# Altium PCB SHT30PCB.PcbDoc
Units mil, origin at the board's own origin, x right, y up, seen from the top; angles counter-clockwise.
Board outline 590 x 630 mil, 2 copper layers (Top Layer, Bottom Layer); 8 components, 7 nets, 28 pads, 6 vias.
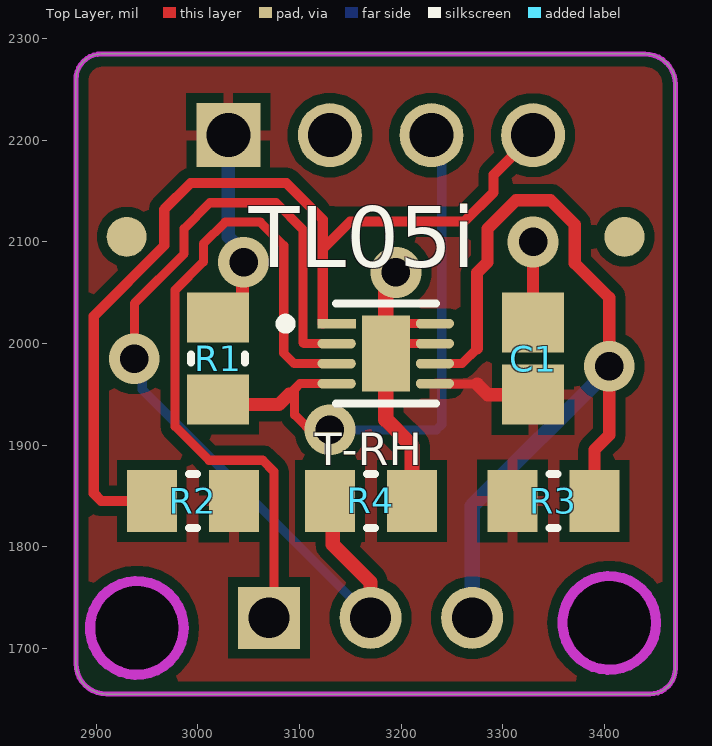
[diagram p0: Top Layer view]
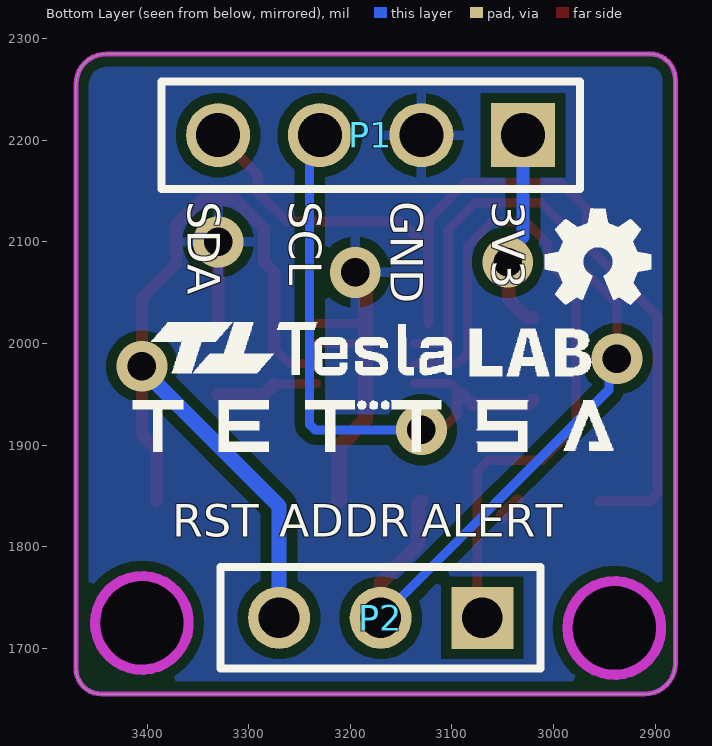
[diagram p1: Bottom Layer view, seen from below]

## Layer stack, top to bottom
Top Solder: solder mask 0.4, Solder Resist, Dk 3.5
Top Layer: signal copper 1.4
Dielectric 1: dielectric 12.6, FR-4, Dk 4.8
Bottom Layer: signal copper 1.4
Bottom Solder: solder mask 0.4, Solder Resist, Dk 3.5

## Board outline
2880,1685 2880,2260 cw(c2905,2260) 2905,2285 3440,2285 cw(c3440,2255) 3470,2255 3470,1680 cw(c3445,1680) 3445,1655 2910,1655 cw(c2910,1685)
cut-out: 2893.9,1720 ccw(c2940,1720) 2940,1673.9 ccw(c2940,1720) 2986.1,1720 ccw(c2940,1720) 2940,1766.1 ccw(c2940,1720)
cut-out: 3358.9,1725 ccw(c3405,1725) 3405,1678.9 ccw(c3405,1725) 3451.1,1725 ccw(c3405,1725) 3405,1771.1 ccw(c3405,1725)

## Design rules (kind name [scope] priority, off if disabled: settings)
Clearance [All] p1: gap=10 ignorepadtopadclearanceinfootprint=FALSE except(0: Arc-Hole Track-Hole SMDPad-Hole THPad-Hole Via-Hole Fill-Hole Poly-Hole Region-Hole Text-Hole; 5: Arc-SMDPad Arc-THPad Track-SMDPad Track-THPad SMDPad-SMDPad SMDPad-THPad THPad-THPad)
HoleSize [All] p1: absolutevalues=TRUE maxlimit=248.03 minlimit=11.81 maxpercent=80.000 minpercent=20.000
PolygonConnect [All] p1: connectstyle=Relief reliefconductorwidth=10 reliefentries=4 polygonreliefangle="90 Angle" airgapwidth=10
RoutingVias [All] p1: holewidth=15.75 width=29.53 viastyle="Through Hole" minholewidth=11.81 minwidth=23.62 maxholewidth=248.03 maxwidth=393.7
SolderMaskExpansion [All] p1: expansion=4 istentingtop=FALSE
Width [All] p1: maxlimit=15 minlimit=6 preferedwidth=12
29 further rules are at their usual default settings.

## Components (designator, comment, footprint, x,y, rotation, side; value= is the part's Value field where it differs from the comment)
C1 "C0805C106K4PACTU" CAPC2013X140X50ML20T25 3330,1985 r270 top
P1 "61300411121" 61300411121 3180,2205 r0 bottom
P2 "TSW-103-07-F-S" SMTC-TSW-103-07-X-S 3070,1730 r0 bottom
R1 "10 kOhms" RESC2013X60X30ML20T20 3020,1985 r270 top
R2 "10 kOhms" RESC2013X60X30ML20T20 2995,1845 r180 top
R3 "10 kOhms" RESC2013X60X30ML20T20 3350,1845 r0 top
R4 "10 kOhms" RESC2013X60X30ML20T20 3170.35,1845 r0 top
TL05i "SHT30-DIS-B2.5KS" FP-SHT30-DIS-B2_5KS-IPC_A 3185,1990 r0 top (schematic designator U1)

## Footprints (in the part's own frame and the unit in brackets; to place one, negate y for a bottom-side part, rotate by r counter-clockwise, add the part's x,y. Pads: shape width x height; smd on the part's side, far side on the other; paste and mask are expansions set on the pad)
61300411121 [mm] "Pin Header, pitch 2.54 mm, THT, Vertical, single row, 4p"
  rect 1.6x1.6 hole 1.1: 1(-3.81,0)
  round 1.6 hole 1.1: 2(-1.27,0) 3(1.27,0) 4(3.81,0)
  silkscreen extent -5.23,-1.35 5.23,1.35, body extent -5.08,-1.27 5.08,1.27, height 8.57
CAPC2013X140X50ML20T25 [mm] "Chip Capacitor, 2-Leads, Body 2.00x1.25mm, IPC Low Density"
  rect 1.5x1.55 smd: 1(-0.9,0) 2(0.9,0)
  body extent -1.1,-0.72 1.1,0.72, height 1.4
FP-SHT30-DIS-B2_5KS-IPC_A [mm]
  rect 0.956x0.242 smd paste+0 mask+0: 1(-1.228,0.75)
  rrect100% 0.956x0.242 smd paste+0 mask+0: 2(-1.228,0.25) 3(-1.228,-0.25) 4(-1.228,-0.75) 5(1.228,-0.75) 6(1.228,-0.25) 7(1.228,0.25) 8(1.228,0.75)
  rect 1.2x1.9 smd paste-1000 mask+0: 9(0,0)
  silkscreen extent -2.63,-1.25 1.25,1.25, body extent -2.21,-1.75 2.21,1.75, height 0.25
RESC2013X60X30ML20T20 [mm] "Chip Resistor, 2-Leads, Body 2.00x1.25mm, IPC Low Density"
  rect 1.25x1.55 smd: 1(-1.025,0) 2(1.025,0)
  silkscreen extent -0.1,-0.67 0.1,0.67, body extent -1.1,-0.72 1.1,0.72, height 0.6
SMTC-TSW-103-07-X-S [mm] ".025 SQ Post Terminal Strip Assembly, 1x3 Pins, Vertical, 2.54mm Pitch, Male"
  rect 1.55x1.55 hole 1.02: 1(0,0)
  round 1.55 hole 1.02: 2(2.54,0) 3(5.08,0)
  silkscreen extent -1.46,-1.27 6.54,1.27, body extent -1.27,-1.27 6.35,1.27, height 8.38

## Part data
C1: library part CMP-2007-03242-1, "10µF ±10% 16V Ceramic Capacitor X5R 0805 (2012 Metric)", Part Number=CL21A106KOQNNNG
P1: library part CMP-1502-01064-1, "THT Vertical Pin Header WR-PHD, Pitch 2.54 mm, Single Row, 4 pins", Contact Resistance=20mOhm, Manufacturer="Wurth Elektronik", Operating Temperature=-40to105degC, Rated Current=3A, Withstanding Voltage=500VAC, Working Voltage=250VAC, Datasheet URL=https://katalog.we-online.de/em/datasheet/6130xx11121.pdf, Gender=Male, Manufacturer URL=http://www.we-online.de, Mounting Technology=THT, Orientation=Vertical, Package Reference=61300411121, Packaging=Bag, Part Number=61300411121, Pin Number=4, Pitch=2.54mm, Publisher=WurthElektronik, Row Number=Single
P2: library part CMP-1024-00331-1, "0.025\" SQ Post Header, Through-hole, Vertical, -55 to 125 degC, 2.54 mm Pitch, 3-Pin, Male, RoHS", Manufacturer=Samtec, Temperature Range="-55 to 125 degC", ComponentLink1Description="Manufacturer URL", ComponentLink1URL=http://www.samtec.com, ComponentLink2Description=Datasheet, ComponentLink2URL=http://www.samtec.com/documents/webfiles/pdf/TSW_TH.PDF, ComponentLink3Description="Package Specification", ComponentLink3URL=http://www.samtec.com/documents/webfiles/cpdf/TSW-XXX-XX-XXX-X-XX-XXX-MKT.pdf, DatasheetVersion=F-214, Mounting Technology=Through-hole, Orientation=Vertical, PackageDescription=".025[0.64] SQ. Post Terminal Strip Assembly", PackageReference=TSW-103-07-X-S, PackageVersion="DM, 8/1988", PartNumber=TSW-103-07-F-S, Pitch="2.54 mm", RoHS=True
R1 R2 R3 R4: library part CMP-2001-04657-1, "10 kOhms ±5% 0.25W, 1/4W Chip Resistor 0805 (2012 Metric) Automotive AEC-Q200, Moisture Resistant Thick Film", Manufacturer="KOA Speer", Part Number=RK73B2ATTD103J
TL05i: library part CMP-144040-000006-1, "SENSOR HUMID/TEMP 5V I2C 3% SMD"

## Free pads (board coordinates)
  round 39.37 smd paste+0 mask+19.68: 100(2930,2105) 100(3420,2105)

## Via types
v1: diameter 50, hole 28, Top Layer to Bottom Layer, tented both sides, 6 vias

## Nets (pads, with @x,y where several pads share a name; then routed paths per layer and width w, separated by ;. In a path a pad name is that pad's centre, name@x,y a point inside that pad or via, vN(x,y) a via of type N, cw(c..) or ccw(c..) an arc to the next point about the centre after c; other vN are vias at no path point)
3V3: C1.2 P1.1 R1.1 R2.1 R3.1 TL05i.5 | length 321.6
  Top Layer w9: TL05i.5 3247.54,1960.47 3248.02,1960 3275,1960
  Top Layer w13: R1.1 3025.91,2025.35 3044.01,2043.46 3044.01,2079.01 v1(3045,2080) ; R2.1 R2.1@3050,1830.35 ; 3275,1960 3285.43,1949.57 C1.2
  Bottom Layer w13: P1.1 3030,2105.01 3045,2090.01 v1(3045,2080)
ADDR: P2.2 R4.1 TL05i.2 | length 914.6
  Top Layer w9: v1(2937.5,1985) 2937.5,2039.37 2986.5,2088.37 2986.5,2113.09 3011.91,2138.5 3077,2138.5 3103.5,2112 3103.5,2000.67 3104.33,1999.84 TL05i.2
  Top Layer w14: R4.1 3132.77,1842.23 3132.77,1802.23 3170,1765 P2.2
  Bottom Layer w9: v1(2937.5,1985) 2945.34,1977.16 2945.34,1954.66 P2.2
ALERT: P2.1 TL05i.3 | length 712.7
  Top Layer w9: P2.1 3075,1735 3075,1873.91 3063.9,1885.01 3011.08,1885.01 2977.64,1918.46 2977.64,2052.64 3005.5,2080.5 3005.5,2098.09 3026.91,2119.5 3061.36,2119.5 3084.5,2096.36 3084.5,1990.5 3094.84,1980.16 TL05i.3
GND: C1.1 P1.2 R4.2 TL05i.7 TL05i.8 TL05i.9 | length 422
  Top Layer w9: TL05i.9 3194.84,1999.84 TL05i.7 ; TL05i.9@3185,2015 3189.53,2019.53 TL05i.8
  Top Layer w12: C1.1 v1(3330,2100)
  Top Layer w15: v1(3195,2070) 3195,2065 3185,2055 3185,2015 TL05i.9 3185,1925 3210.71,1899.29 R4.2
RST: P2.3 R3.2 TL05i.6 | length 872.9
  Top Layer w9: TL05i.6 3259.89,1980.16 3274.73,1995
  Top Layer w12: 3274.73,1995 3274.73,2069.73 3285,2080 3285,2112.98 3313.02,2141 3346.98,2141 3371,2116.98 3371,2079 3405,2045 v1(3405,1977.5) 3405,1910 3390.35,1895.35 R3.2
  Bottom Layer w15: P2.3 3270,1840 3405,1975 v1(3405,1977.5)
SCL: P1.3 R1.2 TL05i.4 | length 599.7
  Top Layer w9: 3090,1950 3095.24,1955.24 ; v1(3130,1915) 3123.73,1908.73 3116.27,1908.73 3095.24,1929.76 3095.24,1955.24 ; TL05i.4 3100.47,1960.47 3095.24,1955.24
  Top Layer w13: R1.2 3024.65,1940 3080,1940 3090,1950
  Bottom Layer w9: v1(3130,1915) 3234.73,1915 3240,1920.27 3240,2195 P1.3
SDA: P1.4 R2.2 TL05i.1 | length 916
  Top Layer w10: R2.2 2905,1845 2897.5,1852.5 2897.5,2026.95 2967,2096.45 2967,2132 2993,2158 3087,2158 3123,2122 3123,2093 ; TL05i.1@3123,2019.75 3123,2093 ; P1.4 3291.09,2166.09 3291.09,2148.77 3262.32,2120 3150,2120 3123,2093

## Polygon pours and split planes (outlines as drawn)
GND on Bottom Layer "NONET_L-01_P-001" (solid, pour order 1): 2877.49,1685 2877.49,2260 cw(c2905,2260) 2905,2287.51 3440,2287.51 cw(c3440,2255) 3472.51,2255 3472.51,1685 cw(c3440,1685) 3440,1652.48 2910,1652.48 cw(c2910,1685)
3V3 on Top Layer "NONET_L-01_P-001" (solid, pour order 0): 2877.49,1685 2877.49,2260 cw(c2905,2260) 2905,2287.51 3440,2287.51 cw(c3440,2255) 3472.51,2255 3472.51,1685 cw(c3440,1685) 3440,1652.48 2910,1652.48 cw(c2910,1685)

## Keep-outs
Keep-Out Layer:
  circle w10: c2940,1720 r46.1
  circle w10: c3405,1725 r46.1
  lines w5: 2880,1685 ccw(c2910,1685) 2910,1655 3445,1655 ccw(c3445,1680) 3470,1680 3470,2255 ccw(c3440,2255) 3440,2285 2905,2285 ccw(c2905,2260) 2880,2260 2880,1685

## Silkscreen, mask and mechanical layers (free items; w line width, h text height)
Top Overlay:
  text "T-RH" at 3115,1880 h32
Bottom Overlay:
  drawing of 20 lines, arcs and shapes, not listed
  text "3V3" at 3060,2140 h32 r90
  text "GND" at 3160,2140 h32 r90
  text "SCL" at 3260,2140 h32 r90
  text "SDA" at 3360,2140 h32 r90
  text "ALERT" at 3130,1810 h32
  text "ADDR" at 3270,1810 h32
  text "RST" at 3375,1810 h32